# EAGLE board RF-detector (EAGLE 8.3.1)
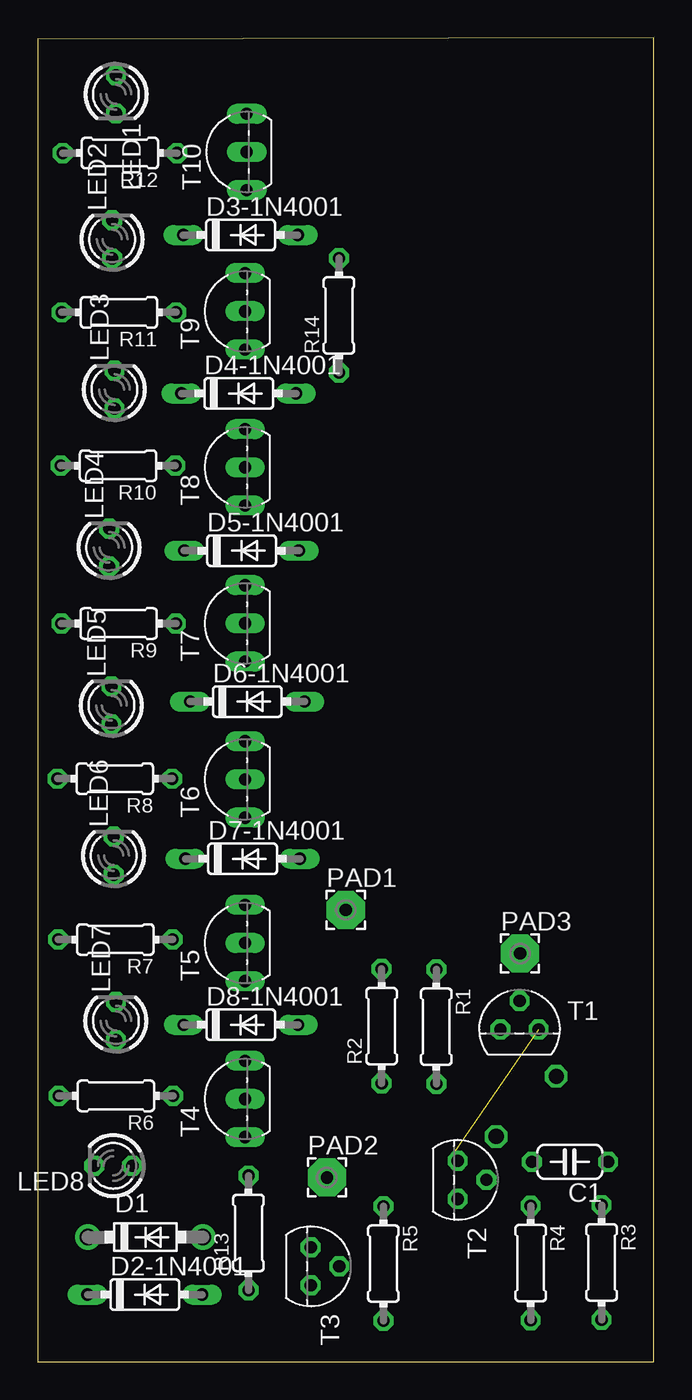
[diagram p0: board, top side]
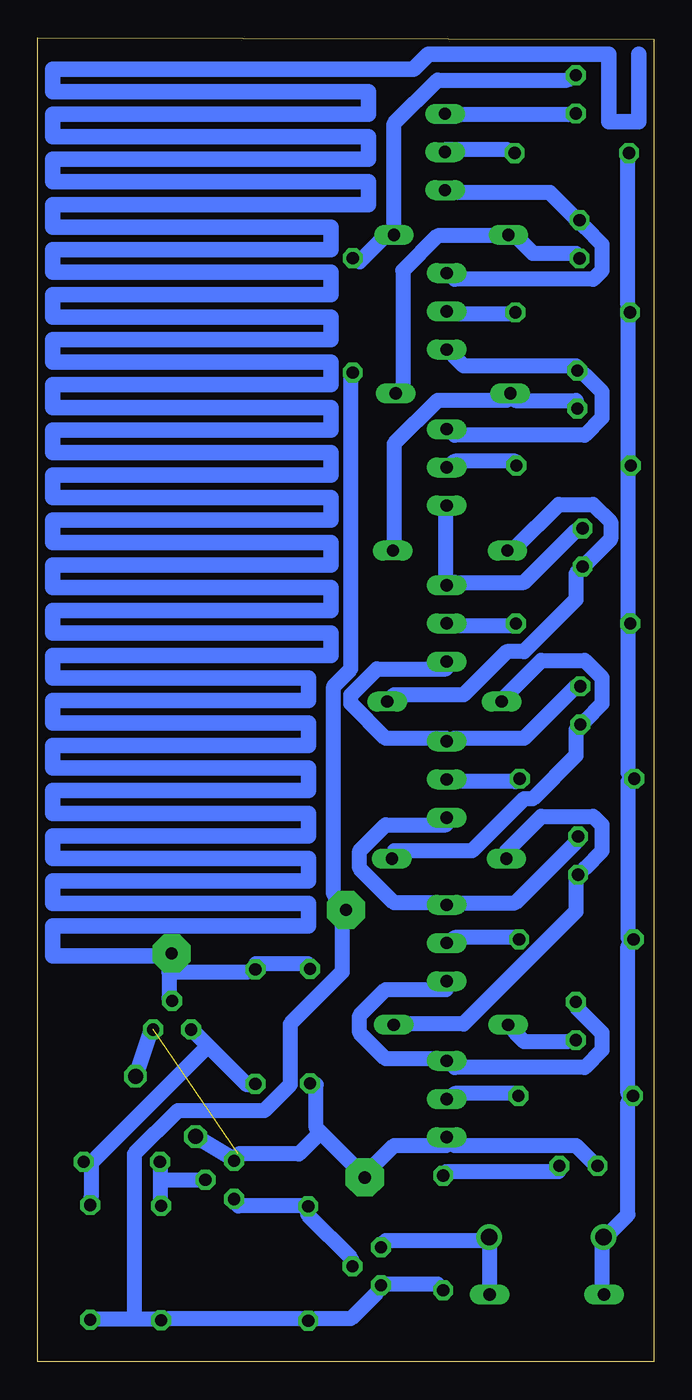
[diagram p1: board, bottom side, seen from below]

Size 41 x 88.1 mm. Coordinates in mm from the lower left corner, seen from the top.
Outline: 0,0 41,0 41,88.1 0,88 0,0
Copper layers (1*16): Top 0.035mm / dielectric 1.5mm / Bottom 0.035mm
Design rules "default *": minimum track width 1mm, minimum drill 0.35mm, track to track 6mil, track to pad 6mil, pad to pad 6mil, via to via 6mil, smd to smd 6mil, copper to edge 40mil, drill to drill 6mil, minimum pad ring 10mil, minimum via ring 8mil, stop-mask expansion 4mil, vias tented up to drill 0mil, thermal gap 10mil

## Footprints (pad centres in the part's own frame; a part is rotated, then mirrored left to right if it is on the bottom)
C050-024X044 = drill 0.813 octagon: 1 -2.54,0; 2 2.54,0
DO41-7.6 = drill 1.1 pad 1.7: A 3.81,0; C -3.81,0
DO35-7 = drill 0.813 long: A 3.81,0; C -3.81,0
LED3MM = drill 0.813 octagon: A -1.27,0; K 1.27,0
2,54/0,8 = drill 0.813 pad 2.54 octagon: 1 0,0
0204/7 = drill 0.813 octagon: 1 -3.81,0; 2 3.81,0
TO92 = drill 0.813 octagon: 1 1.27,0; 2 0,1.905; 3 -1.27,0
TO92-EBC = drill 0.813 long: B 0,-1.27; C 2.54,-1.27; E -2.54,-1.27

## Placement (x,y rotation side)
C1  [C050-024X044]  35.41,13.31 180 top
D1  1N5818-B  [DO41-7.6]  7.16,8.3 0 top
D2-1N4001  1N4148DO35-7  [DO35-7]  7.12,4.48 0 top
D3-1N4001  1N4148DO35-7  [DO35-7]  13.49,74.97 0 top
D4-1N4001  1N4148DO35-7  [DO35-7]  13.37,64.43 0 top
D5-1N4001  1N4148DO35-7  [DO35-7]  13.56,53.97 0 top
D6-1N4001  1N4148DO35-7  [DO35-7]  13.94,43.93 0 top
D7-1N4001  1N4148DO35-7  [DO35-7]  13.63,33.47 0 top
D8-1N4001  1N4148DO35-7  [DO35-7]  13.51,22.43 0 top
LED1  [LED3MM]  5.2,84.32 270 top
LED2  [LED3MM]  4.95,74.68 90 top
LED3  [LED3MM]  5.1,64.68 90 top
LED4  [LED3MM]  4.75,54.18 90 top
LED5  [LED3MM]  4.9,43.68 90 top
LED6  [LED3MM]  5.05,33.68 90 top
LED7  [LED3MM]  5.2,22.68 90 top
LED8  [LED3MM]  5.02,13.05 180 top
PAD1  +7.4v  [2,54/0,8]  20.49,30.07 0 top
PAD2  GND  [2,54/0,8]  19.24,12.27 0 top
PAD3  ANT  [2,54/0,8]  32.09,27.17 0 top
R1  1M  [0204/7]  26.52,22.3 270 top
R2  470k  [0204/7]  22.88,22.34 90 top
R3  10k  [0204/7]  37.52,6.62 270 top
R4  1M  [0204/7]  32.8,6.58 270 top
R5  690k  [0204/7]  23,6.54 270 top
R6  1k  [0204/7]  5.2,17.7 180 top
R7  1k  [0204/7]  5.16,28.1 180 top
R8  1k  [0204/7]  5.12,38.8 180 top
R9  1k  [0204/7]  5.38,49.12 180 top
R10  1k  [0204/7]  5.34,59.62 180 top
R11  1k  [0204/7]  5.4,69.82 180 top
R12  1k  [0204/7]  5.46,80.42 180 top
R13  10k  [0204/7]  14.02,8.58 90 top
R14  470  [0204/7]  20.04,69.62 90 top
T1  BC547  [TO92]  32.06,22.11 0 top
T2  2N3904  [TO92]  27.94,12.11 270 top
T3  2N3904  [TO92]  18.16,6.36 270 top
T4  S9014  [TO92-EBC]  12.52,17.49 90 top
T5  S9014  [TO92-EBC]  12.52,27.87 90 top
T6  S9014  [TO92-EBC]  12.52,38.75 90 top
T7  S9014  [TO92-EBC]  12.52,49.13 90 top
T8  S9014  [TO92-EBC]  12.52,59.51 90 top
T9  S9014  [TO92-EBC]  12.52,69.89 90 top
T10  S9014  [TO92-EBC]  12.63,80.49 90 top

## Library data of the parts
C1 R1-R14 = resistor
D1 D2-1N4001 D3-1N4001 D4-1N4001 D5-1N4001 D6-1N4001 D7-1N4001 D8-1N4001 = diode
LED1-LED8 = led
PAD1-PAD3 = wirepad
T1-T10 = transistor

## Nets
N$1: PAD3.1 R1.1 R2.2 T1.2
N$2: C1.1 R1.2 R3.1 T1.3
N$3: C1.2 R4.1 T2.2
N$4: R5.1 T2.1 T3.2
N$5: PAD1.1 R3.2 R4.2 R5.2 R13.1 R14.1 T3.1
N$7: LED8.K PAD2.1 R2.1 T1.1 T2.3 T4.E
N$8: D1.A D2-1N4001.A T3.3
N$9: R6.1 T4.B
N$10: D1.C D2-1N4001.C R6.2 R7.2 R8.2 R9.2 R10.2 R11.2 R12.2
N$11: R7.1 T5.B
N$12: R8.1 T6.B
N$13: R9.1 T7.B
N$14: R10.1 T8.B
N$15: R11.1 T9.B
N$16: R12.1 T10.B
N$17: LED2.K T9.C T10.E
N$18: LED3.K T8.C T9.E
N$19: LED4.K T7.C T8.E
N$20: LED5.K T6.C T7.E
N$21: LED6.K T5.C T6.E
N$22: LED7.K T4.C T5.E
N$23: LED1.K T10.C
N$24: D3-1N4001.A LED1.A R14.2
N$25: D3-1N4001.C D4-1N4001.A LED2.A
N$26: D4-1N4001.C D5-1N4001.A LED3.A
N$27: D5-1N4001.C D6-1N4001.A LED4.A
N$28: D6-1N4001.C D7-1N4001.A LED5.A
N$29: D7-1N4001.C D8-1N4001.A LED6.A
N$30: D8-1N4001.C LED7.A
N$31: LED8.A R13.2

## Tracks (layer width: path | path; a pad name or v marks a point on that pad's centre or on a via)
N$1
  Bottom 1: R2.2 23.05,26.5 26.5,26.5 R1.1 27.08,25.93 32.27,25.93 | 32.27,25.93 32.27,27.08 PAD3.1 32.27,25.93 | 32.27,25.93 32.27,24.2 T1.2
N$2
  Bottom 1: 37.45,13.25 37.45,10.95 R3.1 | 29.67,21.03 30.54,21.9 T1.3 | 29.67,21.03 27.08,18.44 R1.2 | 29.67,21.03 37.45,13.25 | 37.45,13.25 C1.1
N$3
  Bottom 1: 32.84,12.1 32.84,13.25 C1.2 | 32.84,12.1 32.84,10.95 R4.1 | 32.84,12.1 29.96,12.1 T2.2
N$4
  Bottom 1: T3.2 20.17,6.91 23.05,9.79 R5.1 23.05,10.37 27.66,10.37 T2.1
N$5
  Bottom 1: 34.57,2.88 37.45,2.88 R3.2 | 34.57,2.88 32.84,2.88 R4.2 32.27,2.88 23.05,2.88 R5.2 22.47,2.88 20.17,2.88 18.44,4.61 T3.1 17.86,5.19 14.4,5.19 R13.1 | R14.1 20.17,65.69 20.17,46.1 21.32,44.94 21.32,31.11 20.74,30.54 PAD1.1 20.74,29.96 20.74,25.93 24.2,22.47 24.2,18.44 25.93,16.71 31.69,16.71 34.57,13.83 34.57,2.88
N$7  (1 unrouted)
  Bottom 1: LED8.K 4.03,13.25 5.19,14.4 13.25,14.4 T4.E 13.83,14.4 17.29,14.4 19.02,12.68 PAD2.1 19.59,12.68 22.18,15.27 | 22.18,15.27 22.47,15.56 22.47,18.44 R2.1 | 22.18,15.27 23.62,13.83 27.66,13.83 T2.3
N$8
  Bottom 1: D2-1N4001.A 10.95,4.61 10.95,8.07 D1.A 11.52,8.07 17.86,8.07 T3.3
N$9
  Bottom 1: T4.B 13.25,17.86 9.22,17.86 R6.1
N$10
  Bottom 1: D2-1N4001.C 3.46,4.61 3.46,8.07 D1.C 2.88,8.64 1.73,9.79 1.73,17.29 R6.2 1.73,17.86 1.73,27.66 R7.2 1.73,28.23 1.73,38.6 R8.2 1.73,39.18 1.73,48.98 R9.2 1.73,49.55 1.73,59.35 R10.2 1.73,59.92 1.73,69.72 R11.2 1.73,70.3 1.73,80.09 R12.2
N$11
  Bottom 1: T5.B 13.25,28.23 9.22,28.23 R7.1
N$12
  Bottom 1: T6.B 13.25,38.6 9.22,38.6 R8.1
N$13
  Bottom 1: R9.1 9.22,48.98 13.25,48.98 T7.B
N$14
  Bottom 1: T8.B 13.25,59.92 9.22,59.92 R10.1
N$15
  Bottom 1: R11.1 9.22,69.72 13.25,69.72 T9.B
N$16
  Bottom 1: R12.1 9.79,80.67 13.83,80.67 T10.B
N$17
  Bottom 1: T9.C 13.25,72.03 4.03,72.03 3.46,72.6 3.46,74.33 4.61,75.48 LED2.K 5.19,76.06 6.91,77.79 13.83,77.79 T10.E
N$18
  Bottom 1: T9.E 13.25,66.84 12.68,66.26 5.19,66.26 LED3.K 4.61,65.69 3.46,64.53 3.46,62.81 4.61,61.65 13.25,61.65 T8.C
N$19
  Bottom 1: LED4.K 5.19,55.31 8.64,51.86 13.25,51.86 T7.C 13.83,51.86 13.83,56.47 T8.E
N$20
  Bottom 1: LED5.K 5.19,44.94 8.64,41.49 13.25,41.49 T6.C 13.83,41.49 17.86,41.49 20.17,43.79 20.17,44.37 18.44,46.1 13.83,46.1 T7.E
N$21
  Bottom 1: LED6.K 5.19,34.57 9.22,30.54 13.25,30.54 T5.C 13.83,30.54 17.29,30.54 19.59,32.84 19.59,34 17.86,35.72 13.83,35.72 T6.E
N$22
  Bottom 1: LED7.K 5.19,23.62 3.46,21.9 3.46,20.74 4.61,19.59 13.25,19.59 T4.C 13.83,20.17 17.86,20.17 19.59,21.9 19.59,23.05 17.86,24.78 13.83,24.78 T5.E
N$23
  Bottom 1: T10.C 13.83,82.97 5.76,82.97 LED1.K
N$24
  Bottom 1: R14.2 19.59,73.18 17.86,74.91 D3-1N4001.A 17.29,75.48 17.29,82.4 14.4,85.28 5.76,85.28 LED1.A
N$25
  Bottom 1: LED2.A 5.19,73.75 8.07,73.75 9.22,74.91 D3-1N4001.C 9.79,74.91 14.4,74.91 16.71,72.6 16.71,64.53 D4-1N4001.A
N$26
  Bottom 1: D5-1N4001.A 17.29,54.16 17.29,61.08 14.4,63.96 9.79,63.96 D4-1N4001.C 9.22,63.96 5.19,63.96 LED3.A
N$27
  Bottom 1: D5-1N4001.C 9.22,54.16 6.34,57.04 4.03,57.04 2.88,55.89 2.88,54.74 4.61,53.01 LED4.A 5.19,52.43 5.19,50.71 8.64,47.25 9.79,47.25 12.68,44.37 17.29,44.37 D6-1N4001.A
N$28
  Bottom 1: D6-1N4001.C 9.79,44.37 7.49,46.67 4.61,46.67 3.46,45.52 3.46,43.79 4.61,42.64 LED5.A 5.19,42.06 5.19,40.33 8.07,37.45 8.64,37.45 12.1,34 17.29,34 D7-1N4001.A
N$29
  Bottom 1: D7-1N4001.C 9.79,34 7.49,36.3 4.03,36.3 3.46,35.72 3.46,34 4.61,32.84 LED6.A 5.19,32.27 5.19,29.96 12.68,22.47 17.29,22.47 D8-1N4001.A
N$30
  Bottom 1: LED7.A 5.76,21.32 8.64,21.32 9.22,21.9 D8-1N4001.C
N$31
  Bottom 1: LED8.A 6.34,12.68 13.83,12.68 R13.2
S$1  (via drill 1)
  Bottom 1.016: 28,13.5 v30.5,15
S$2  (via drill 1)
  Bottom 1.016: 33.5,22 v34.5,19
S$5
  Bottom 1.016: 32.5,27 36.5,27 37,27 40,27 40,29 23,29 23,30.5 40,30.5 40,32 23,32 23,33.5 40,33.5 40,35 23,35 23,36.5 40,36.5 40,38 23,38 23,39.5 40,39.5 40,41 23,41 23,42.5 40,42.5 40,44 23,44 23,45.5 40,45.5 40,47 21.5,47 21.5,48.5 40,48.5 40,50 21.5,50 21.5,51.5 40,51.5 40,53 21.5,53 21.5,54.5 40,54.5 40,56 21.5,56 21.5,57.5 40,57.5 40,59 21.5,59 21.5,60.5 40,60.5 40,62 21.5,62 21.5,63.5 40,63.5 40,65 21.5,65 21.5,66.5 40,66.5 40,68 21.5,68 21.5,69.5 40,69.5 40,71 21.5,71 21.5,72.5 40,72.5 40,74 21.5,74 21.5,75.5 40,75.5 40,77 19,77 19,78.5 40,78.5 40,80 19,80 19,81.5 40,81.5 40,83 19,83 19,84.5 40,84.5 40,86 16,86 15,87 3,87 3,82.5 1,82.5 1,87